# Altium PCB boost_old.PcbDoc
Units mm, origin at the board's own origin, x right, y up, seen from the top; angles counter-clockwise.
Board outline 99.95 x 50.04 mm, 2 copper layers (Top Layer, Bottom Layer); 24 components, 16 nets, 83 pads, 0 vias.
Unrouted connection lines stored in the file: 67.
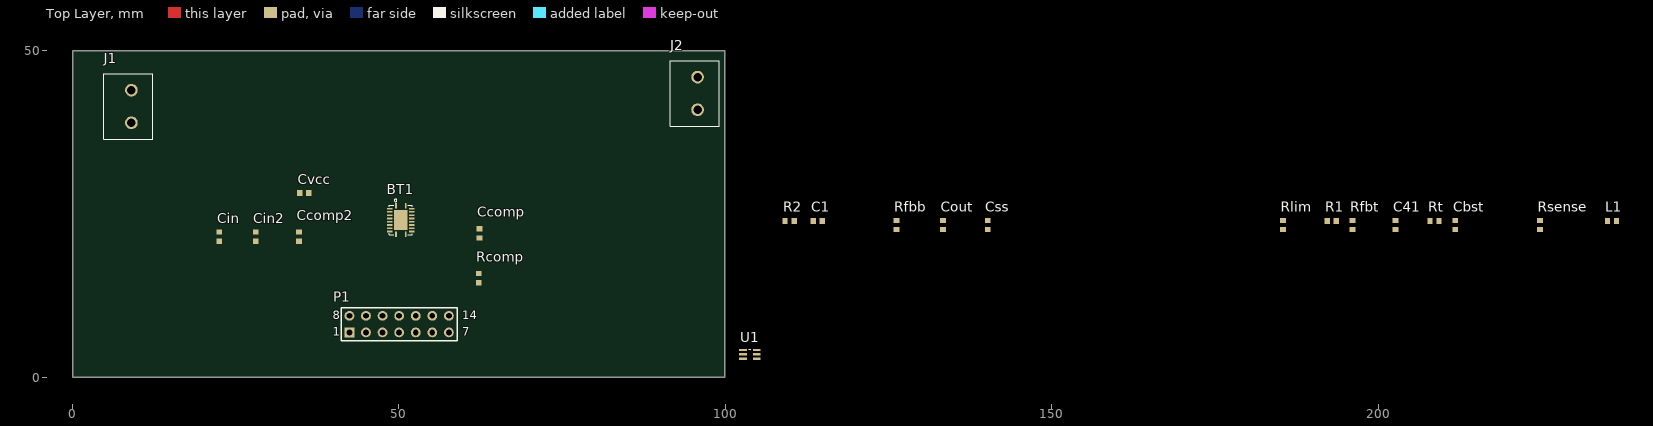
[diagram p0: Top Layer view]
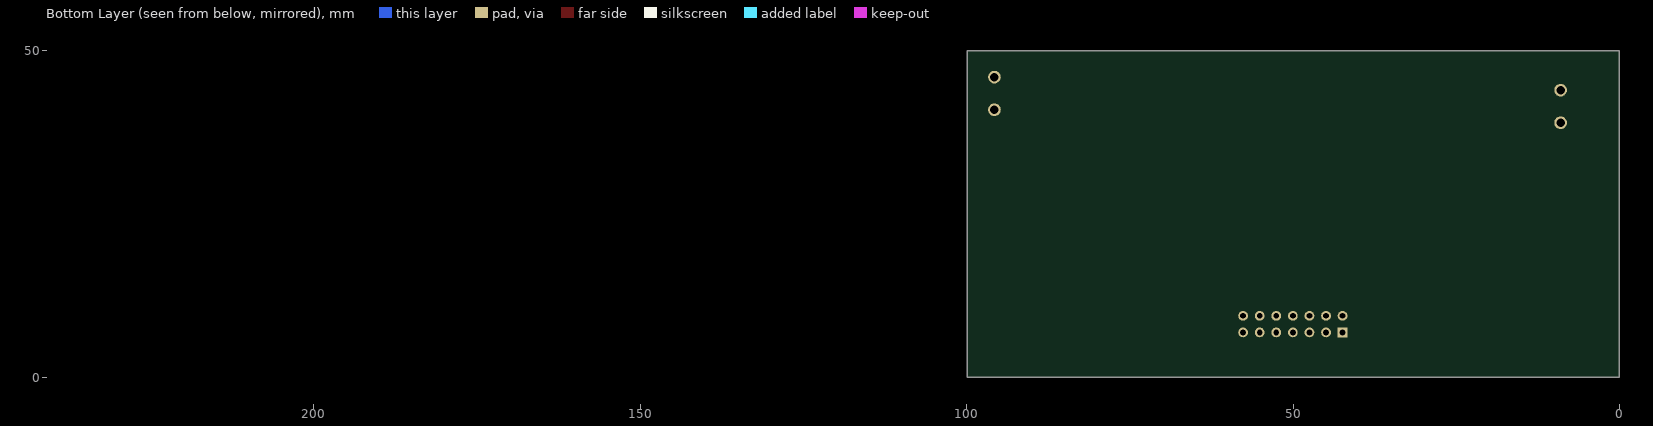
[diagram p1: Bottom Layer view, seen from below]

## Layer stack, top to bottom
Top Solder: solder mask 0.0102, Solder Resist, Dk 3.5
Top Layer: signal copper 0.0356
Dielectric 1: dielectric 0.32, FR-4, Dk 4.8
Bottom Layer: signal copper 0.0356
Bottom Solder: solder mask 0.0102, Solder Resist, Dk 3.5

## Board outline
0,0 99.949,0 99.949,50.038 0,50.038

## Design rules (kind name [scope] priority, off if disabled: settings)
Clearance [All] p1: gap=0.254 ignorepadtopadclearanceinfootprint=FALSE except(0: Arc-Hole Track-Hole SMDPad-Hole THPad-Hole Via-Hole Fill-Hole Poly-Hole Region-Hole Text-Hole)
PolygonConnect [All] p1: connectstyle=Relief reliefconductorwidth=0.254 reliefentries=4 polygonreliefangle="90 Angle" airgapwidth=0.254
RoomDefinition boost [InComponentClass('boost')] p1: confinementstyle=ConfineIn formatcopy=TRUE lockcomponents=FALSE outline 101.854,2.224 237.363,2.224 237.363,27.243 101.854,27.243
RoutingVias [All] p1: holewidth=0.711 width=1.27 viastyle="Through Hole" minholewidth=0.711 minwidth=1.27 maxholewidth=0.711 maxwidth=1.27
SolderMaskExpansion [All] p1: expansion=0.102
Width [All] p1: maxlimit=0.254 minlimit=0.254 preferedwidth=0.254
30 further rules are at their usual default settings.

## Components (designator, comment, footprint, x,y, rotation, side; value= is the part's Value field where it differs from the comment)
BT1 "TPS61088" QFN50P450X350X100-21N 50.292,24.068 r0 top
C1 "" 1608[0603] 114.173,23.941 r0 top value=0.1µF
C41 "Cap Semi" 1608[0603] 202.692,23.306 r90 top value=0.1uF
Cbst "" 1608[0603] 211.836,23.306 r90 top value=100nF
Ccomp "" 1608[0603] 62.357,22.033 r270 top value=470pF
Ccomp2 "" 1608[0603] 34.671,21.528 r90 top value=22pF
Cin "" 1608[0603] 22.479,21.528 r90 top value=47µF
Cin2 "" 1608[0603] 28.067,21.528 r90 top value=100nF
Cout "" 1608[0603] 133.35,23.306 r90 top value=100µF
Css "8.2nF" 1608[0603] 140.208,23.306 r90 top
Cvcc "" 1608[0603] 35.495,28.194 r0 top value=2.2µF
J1 "691102710002" 691102710002 9.017,41.467 r90 top
J2 "691102710002" 691102710002 95.758,43.459 r90 top
L1 "" 1608[0603] 235.839,23.941 r0 top value=600nH
P1 "Header 7X2A" HDR2X7_CEN 42.418,6.858 r0 top
R1 "" 1608[0603] 192.913,23.941 r0 top value=100kO
R2 "" 1608[0603] 109.855,23.941 r0 top value=100kO
Rcomp "" 1608[0603] 62.23,15.175 r270 top value=44.2kO
Rfbb "" 1608[0603] 126.238,23.306 r90 top value=69.8kO
Rfbt "" 1608[0603] 196.088,23.306 r90 top value=220kO
Rlim "" 1608[0603] 185.42,23.306 r90 top value=105kO
Rsense "" 1608[0603] 224.79,23.306 r90 top value=10mO
Rt "RtA1" 1608[0603] 208.661,23.941 r0 top value=267kO
U1 "INA214" SOT65P210X110-6N 103.759,3.494 r0 top

## Footprints (in the part's own frame and the unit in brackets; to place one, negate y for a bottom-side part, rotate by r counter-clockwise, add the part's x,y. Pads: shape width x height; smd on the part's side, far side on the other; paste and mask are expansions set on the pad)
1608[0603] [mm] "Chip Capacitor, Body 1.6x0.8mm, IPC High Density"
  rect 0.8x0.9 smd: 1(-0.7,0) 2(0.7,0)
  body extent -0.87,-0.48 0.87,0.48, height 1.3
691102710002 [mm]
  round 1.95 hole 1.3: 1(-2.5,0) 2(2.5,0)
  silkscreen extent -5,-3.3 5,4.2
HDR2X7_CEN [mm] "Connector; Header; 7x2 Position"
  rect 1.5x1.5 hole 0.9: 1(0,0)
  round 1.5 hole 0.9: 2(2.54,0) 3(5.08,0) 4(7.62,0) 5(10.16,0) 6(12.7,0) 7(15.24,0) 8(0,2.54) 9(2.54,2.54) 10(5.08,2.54) 11(7.62,2.54) 12(10.16,2.54) 13(12.7,2.54) 14(15.24,2.54)
  silkscreen extent -1.27,-1.27 16.51,3.81
QFN50P450X350X100-21N [mm]
  rect 0.26x0.9 smd: 1(-0.75,2.185) 10(-0.75,-2.185) 11(0.75,-2.185) 20(0.75,2.185)
  rect 0.9x0.26 smd: 2(-1.685,1.75) 3(-1.685,1.25) 4(-1.685,0.75) 5(-1.685,0.25) 6(-1.685,-0.25) 7(-1.685,-0.75) 8(-1.685,-1.25) 9(-1.685,-1.75) 12(1.685,-1.75) 13(1.685,-1.25) 14(1.685,-0.75) 15(1.685,-0.25) 16(1.685,0.25) 17(1.685,0.75) 18(1.685,1.25) 19(1.685,1.75)
  rect 2.07x3.07 smd: 21(0,0)
  silkscreen extent -1.75,-2.25 1.75,3.21
SOT65P210X110-6N [mil]
  rect 46x14 smd: 1(-41,26) 2(-41,0) 3(-41,-26) 4(41,-26) 5(41,0) 6(41,26)
  silkscreen extent -5,30 5,31

## Part data
BT1: "Boost converter"
C1 Cbst Ccomp Ccomp2 Cin Cin2 Cout Css Cvcc: library part Cap, "Capacitor", LatestRevisionDate=17-Jul-2002, LatestRevisionNote="Re-released for DXP Platform.", PackageDescription="Radial Cap, Thru-Hole; 2 Leads; 0.3 in Pin Spacing", PackageReference=RAD-0.3, Published=8-Jun-2000, Publisher="Altium Limited"
C41: "Capacitor (Semiconductor SIM Model)", LatestRevisionDate=29-May-2009, LatestRevisionNote="IPC-7351 Footprint Added.", PackageDescription="Chip Capacitor", PackageReference=C1206, Published=8-Jun-2000, Publisher="Altium Limited"
J1 J2: "102 Series 5mm Pitch Straight, PCB Terminal Block, Through Hole, 2 Way", Package=None, Availability=Unavailable, MF="Wurth Electronics", MP=691102710002, Price=None, SnapEDA_Link=https://www.snapeda.com/parts/691102710002/Wurth%20Electronics%20Inc/view-part/?ref=snap
L1: library part Inductor, "Inductor", Code_IEC=1005, Code_JEITA=0402, LatestRevisionDate=29-May-2009, LatestRevisionNote="IPC-7351 Footprint Added.", PackageDescription="Chip Inductor", PackageReference=0402-A, Published=8-Jun-2000, Publisher="Altium Limited"
P1: "Header, 7-Pin, Dual row", LatestRevisionDate=17-Jul-2002, LatestRevisionNote="Re-released for DXP Platform.", Publisher="Altium Limited"
R1 R2 Rcomp Rfbb Rfbt Rlim Rsense Rt: library part Res2, "Resistor", LatestRevisionDate=17-Jul-2002, LatestRevisionNote="Re-released for DXP Platform.", PackageDescription="Axial Device, Thru-Hole; 2 Leads; 0.4 in Pin Spacing", PackageReference=AXIAL-0.4, Published=8-Jun-2000, Publisher="Altium Limited"
U1: "Current monitor", Supplier Part Number 1=296-38956-6-ND, Supplier 1=Digi-Key

## Nets (pads, with @x,y where several pads share a name; then routed paths per layer and width w, separated by ;. In a path a pad name is that pad's centre, name@x,y a point inside that pad or via, vN(x,y) a via of type N, cw(c..) or ccw(c..) an arc to the next point about the centre after c; other vN are vias at no path point)
+3V3: C41.2 U1.1 U1.3
+5V: J2.1 Rsense.2 U1.5
D1: BT1.1 BT1.2 Cvcc.2 P1.1
D2: BT1.3 P1.2 Rt.2
D3: BT1.4 BT1.5 BT1.6 BT1.7 Cbst.1 L1.2 P1.3 Rt.1
D4: BT1.8 Cbst.2 P1.4
D5: BT1.9 Cin2.2 Cin.2 J1.1 L1.1 P1.5
D6: BT1.10 Css.2 P1.6
D8: BT1.11 BT1.12 BT1.13 BT1.20 BT1.21 C1.2 C41.1 Ccomp2.1 Ccomp.1 Cin2.1 Cin.1 Cout.1 Css.1 Cvcc.1 J1.2 J2.2 P1.8 P1.13 R2.1 Rfbb.1 Rlim.1 U1.2
D9: BT1.14 BT1.15 BT1.16 Cout.2 P1.9 R1.2 Rfbt.2 Rsense.1 U1.4
D10: BT1.17 P1.10 Rfbb.2 Rfbt.1
D11: BT1.18 Ccomp2.2 P1.11 Rcomp.2
D12: BT1.19 P1.12 Rlim.2
Iout: P1.14 U1.6
NetCcomp_2: Ccomp.2 Rcomp.1
Vout: C1.1 P1.7 R1.1 R2.2

## Text inside footprints (layer, text, board x,y; h text height)
J1: Mechanical 1 "1" at 11.671,37.811 h1.88 r90
J2: Mechanical 1 "1" at 98.412,39.803 h1.88 r90
P1: Top Overlay "14" at 59.69,8.89 h1.27; Top Overlay "7" at 59.69,6.35 h1.27; Top Overlay "1" at 39.878,6.35 h1.27; Top Overlay "8" at 39.878,8.89 h1.27